# Altium PCB dirver3.PcbDoc
Units mil, origin at the board's own origin, x right, y up, seen from the top; angles counter-clockwise.
Board outline 2165.35 x 2165.35 mil, 2 copper layers (Top Layer, Bottom Layer); 26 components, 28 nets, 106 pads, 33 vias.
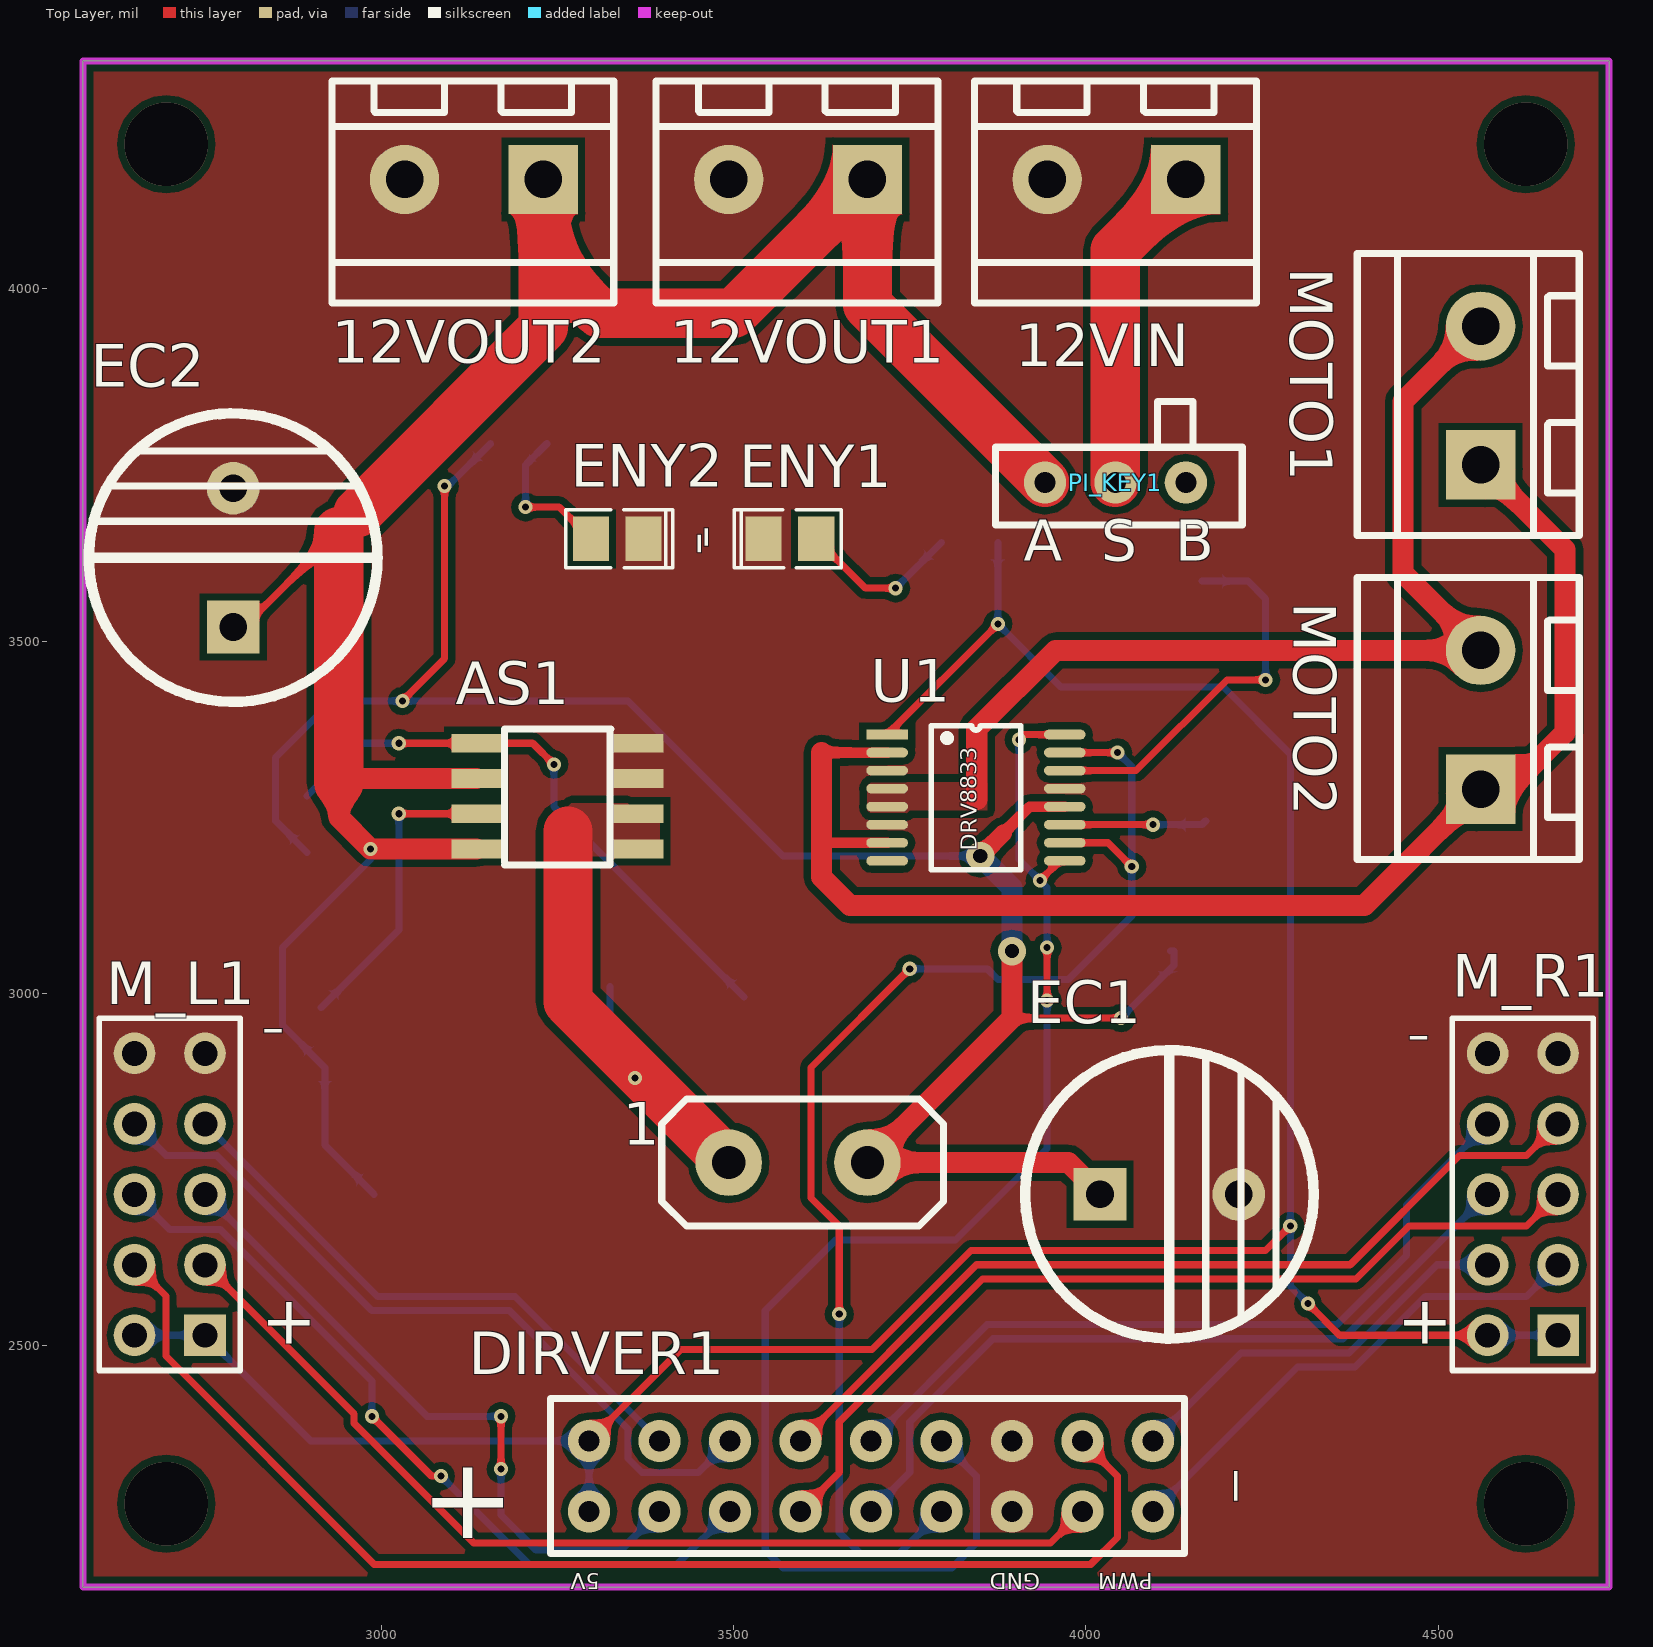
[diagram p0: Top Layer view]
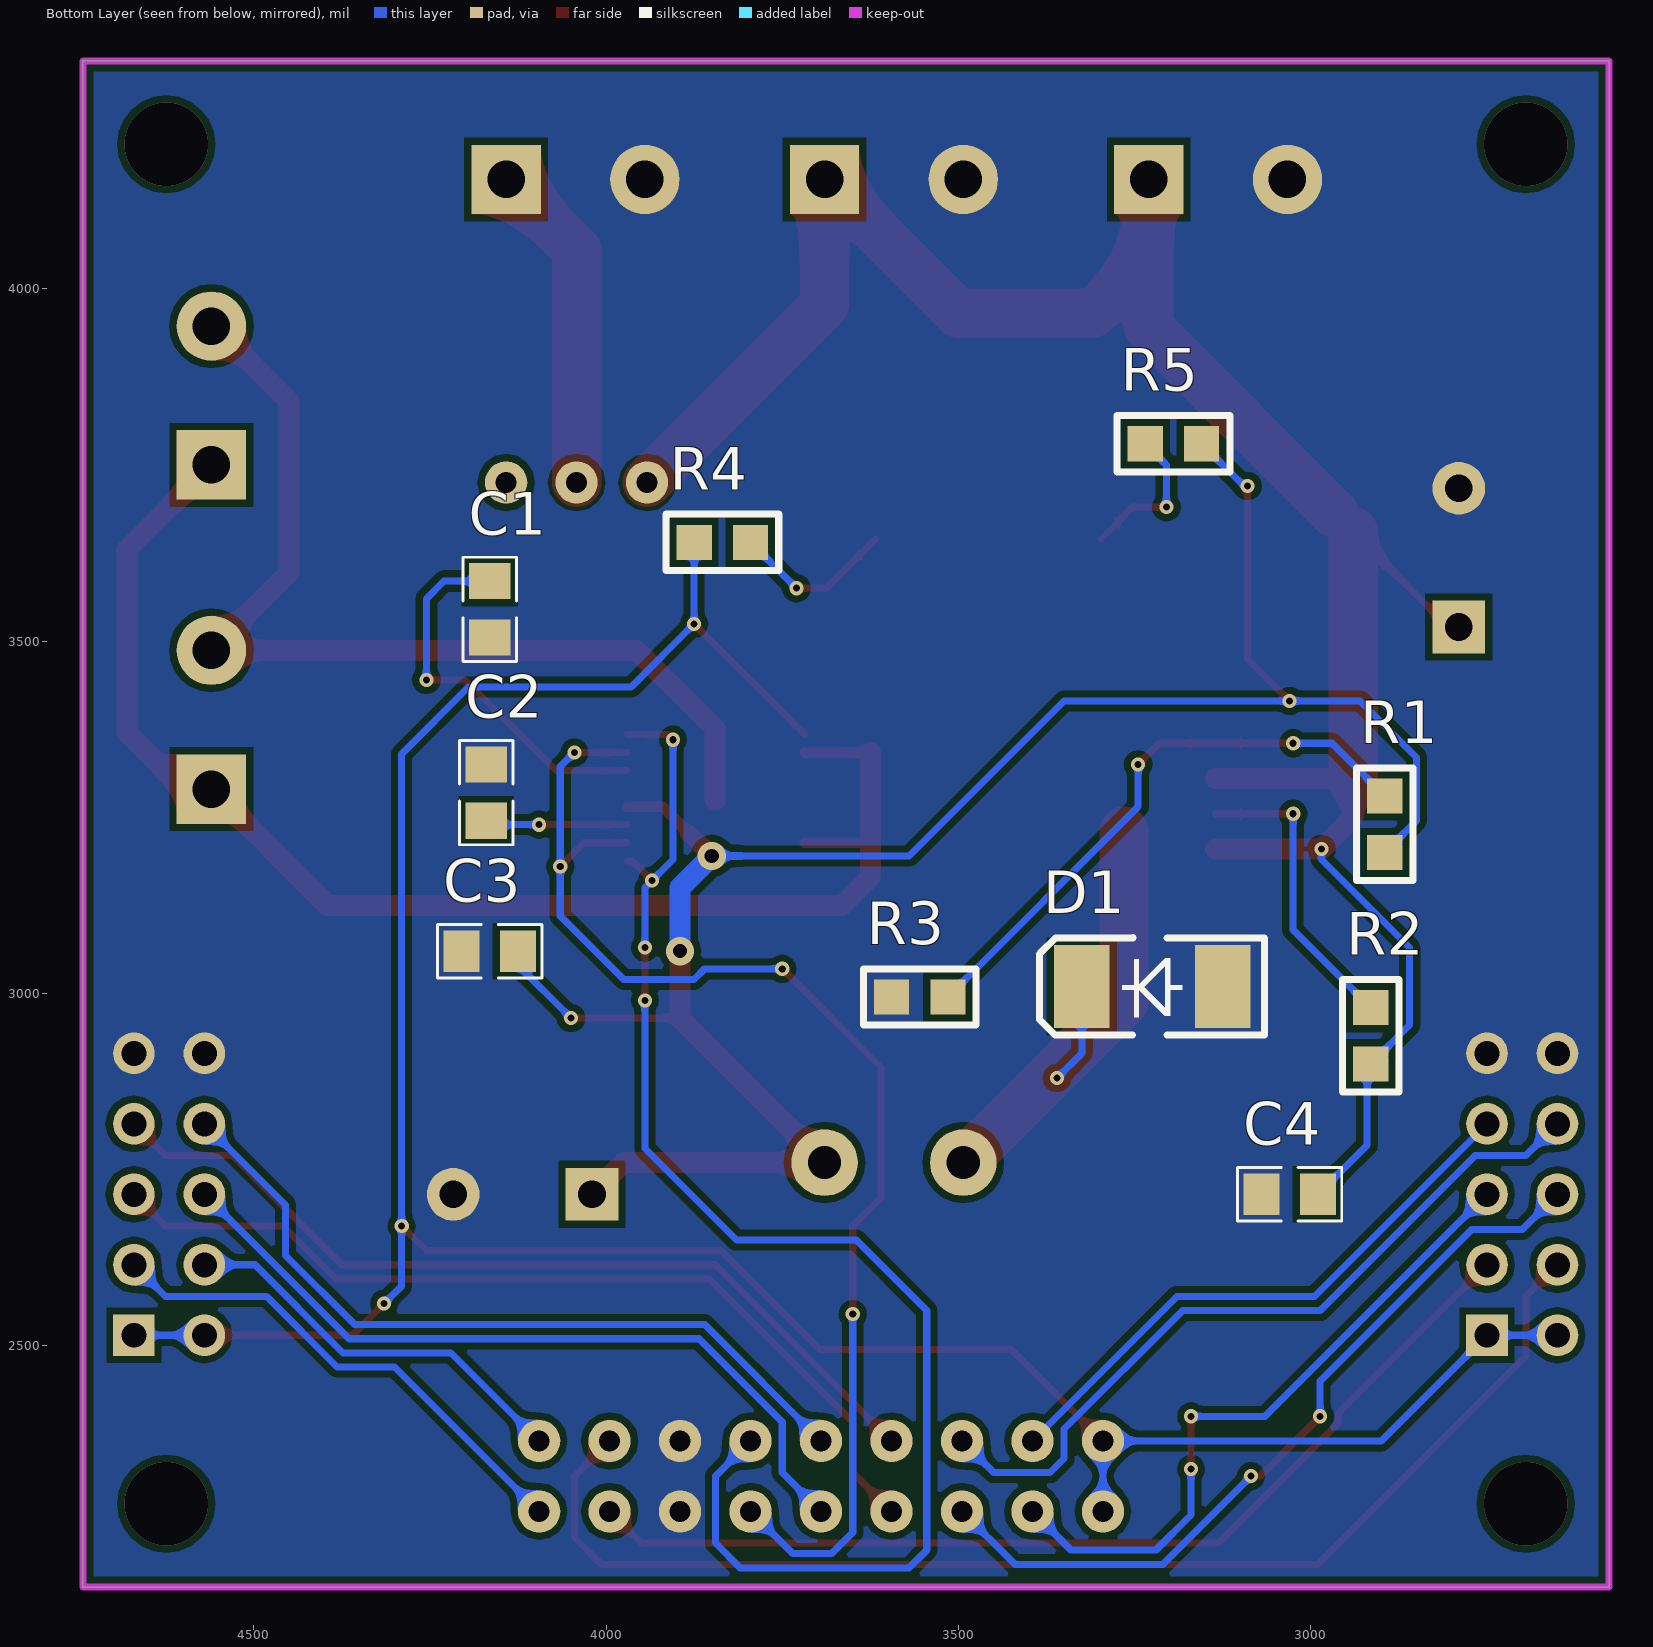
[diagram p1: Bottom Layer view, seen from below]
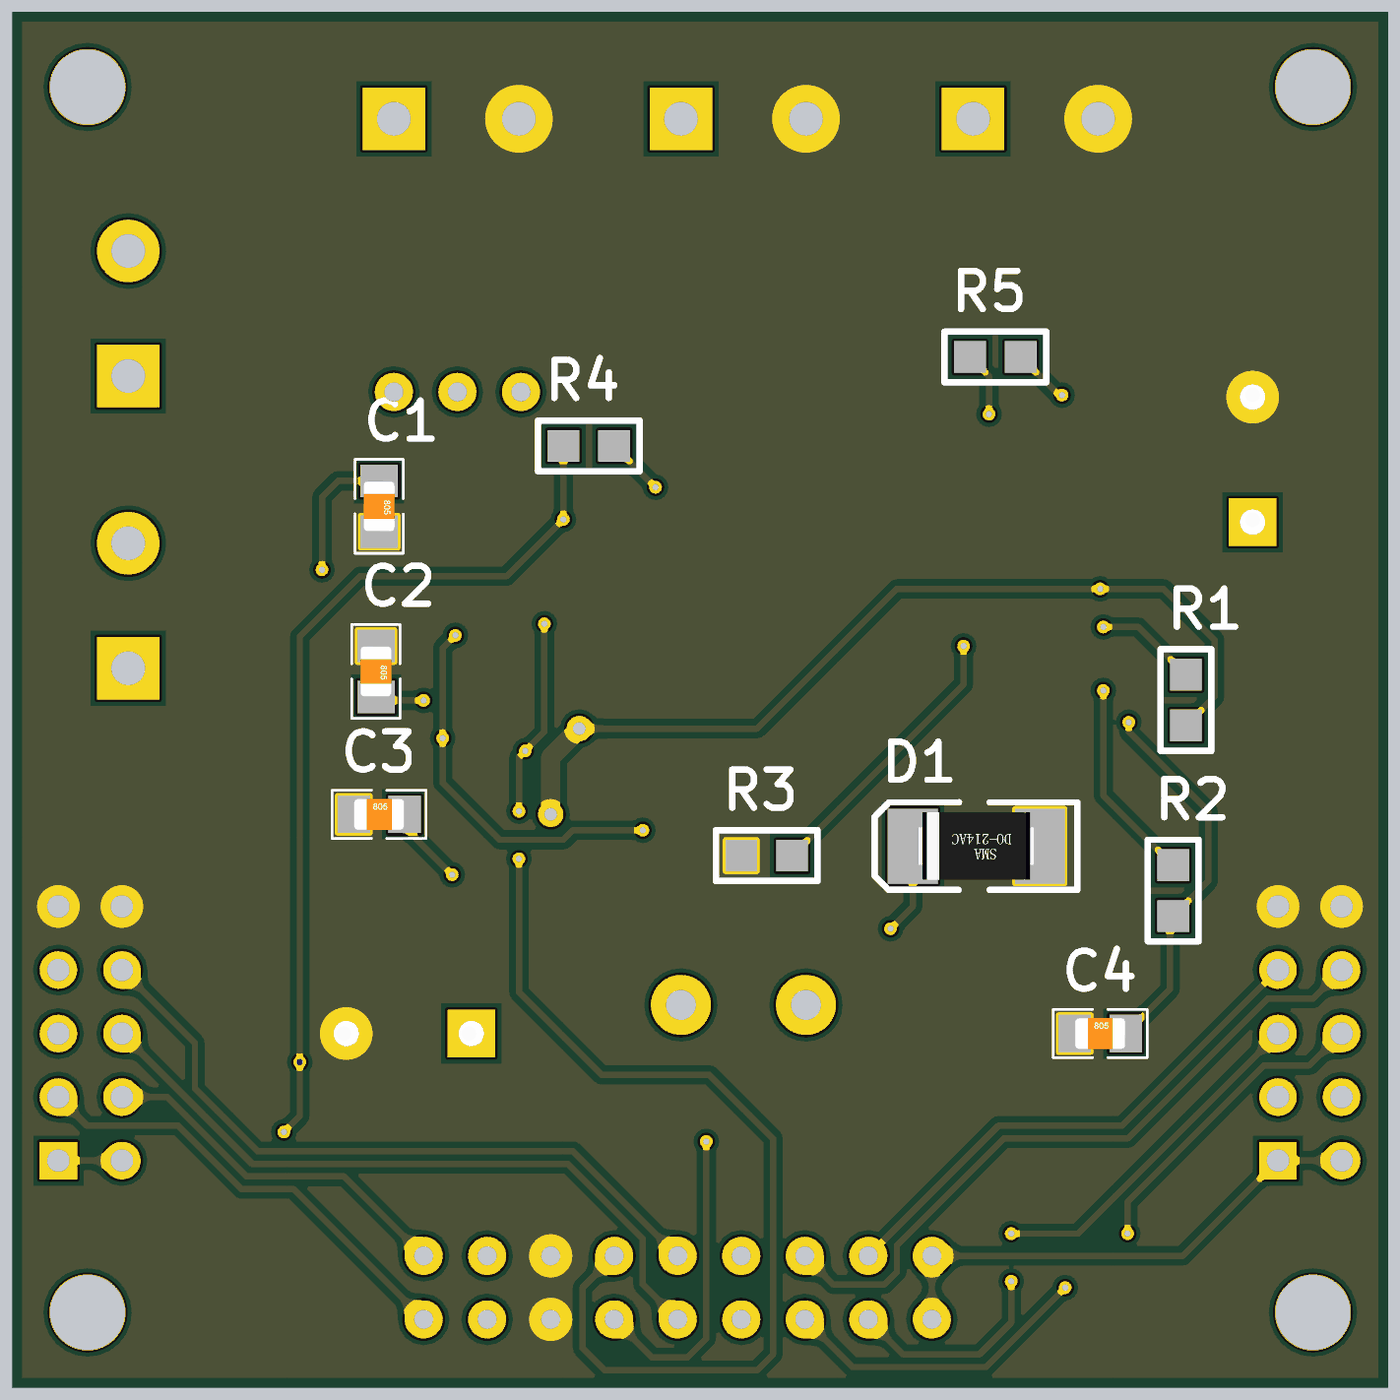
[diagram p2: 3D render of the assembled board from below, using the file's embedded part models]

## Layer stack, top to bottom
Top Solder: solder mask 0.4, Solder Resist, Dk 3.5
Top Layer: signal copper 1.4
Dielectric 1: dielectric 12.6, FR-4, Dk 4.8
Bottom Layer: signal copper 1.4
Bottom Solder: solder mask 0.4, Solder Resist, Dk 3.5

## Board outline
2576.89,2157.76 4742.24,2157.76 4742.24,4323.11 2576.89,4323.11

## Design rules (kind name [scope] priority, off if disabled: settings)
Clearance [All] p1: gap=10 ignorepadtopadclearanceinfootprint=FALSE except(0: Arc-Hole Track-Hole SMDPad-Hole THPad-Hole Via-Hole Fill-Hole Poly-Hole Region-Hole Text-Hole)
PolygonConnect [All] p1: connectstyle=Direct reliefconductorwidth=10 reliefentries=4 polygonreliefangle="90 Angle" airgapwidth=10
RoutingVias [All] p1: holewidth=28 width=50 viastyle="Through Hole" minholewidth=28 minwidth=50 maxholewidth=28 maxwidth=50
SolderMaskExpansion [All] p1: expansion=4
Width [All] p1: maxlimit=500 minlimit=1 preferedwidth=10
30 further rules are at their usual default settings.

## Components (designator, comment, footprint, x,y, rotation, side; value= is the part's Value field where it differs from the comment)
1 "L1" INDUCTOR 3493.15,2780 r0 top
12VIN "HEAD2" HEAD2L-0.8 4141.85,4155 r180 top
12VOUT1 "HEAD2" HEAD2L-0.8 3690,4155 r180 top
12VOUT2 "HEAD2" HEAD2L-0.8 3230,4155 r180 top
AS1 "U1" AS1015 3135,3205 r0 top
C1 "Cap" CAP[0805] 4165,3545 r270 bottom
C2 "Cap" CAP[0805] 4170,3285 r270 bottom
C3 "Cap" CAP[0805] 4165,3060 r180 bottom
C4 "Cap" CAP[0805] 3030,2715 r180 bottom
D1 "IN5824" SMA/DO-214AC 3130,3010 r0 bottom
DIRVER1 "Dirver2" DIRVER2 3295,2265 r90 top
EC1 "330uF" DIP-EC5.0X10X12.5 4020,2715 r0 top
EC2 "330uF" DIP-EC5.0X10X12.5 2790,3520 r90 top
ENY1 "LED0" LED[0805] 3580,3645 r0 top
ENY2 "LED0" LED[0805] 3335,3645 r180 top
M_L1 "Header 5X2" HDR2X5 2750,2515 r90 top
M_R1 "Header 5X2" HDR2X5 4670,2515 r90 top
MOTO1 "HEAD2" HEAD2L-0.8 4560,3750 r90 top
MOTO2 "HEAD2" HEAD2L-0.8 4560,3290 r90 top
PI_KEY1 "PI_KEY" KEY 3941.85,3725 r0 top
R1 "11K" R0805 2895,3280 r270 bottom
R2 "7K5" R0805 2915,2900 r90 bottom
R3 "1K" R0805 3515,2995 r0 bottom
R4 "1K" R0805 3795,3640 r0 bottom
R5 "10K" R0805 3235,3780 r180 bottom
U1 "DRV8833" DRV8833 3718.03,3367.36 r0 top

## Footprints (in the part's own frame and the unit in brackets; to place one, negate y for a bottom-side part, rotate by r counter-clockwise, add the part's x,y. Pads: shape width x height; smd on the part's side, far side on the other; paste and mask are expansions set on the pad)
AS1015 [mm]
  rect 1.8x0.68 smd: 1(0,3.81) 2(0,2.54) 3(0,1.27) 4(0,0) 5(5.842,0) 6(5.842,1.27) 7(5.842,2.54) 8(5.842,3.81)
  round 0.5 on Top Overlay: ""(1.524,3.81)
  silkscreen extent 1.02,-0.58 4.85,4.32
CAP[0805] [mm]
  rect 1.3x1.5 smd: 1(-1.016,0) 2(1.016,0)
  silkscreen extent -1.88,-0.97 1.88,0.97, body extent -1,-0.62 1,0.63, height 0.78
DIP-EC5.0X10X12.5 [mm]
  rect 1.9x1.9 hole 1: 1(0,0)
  round 1.9 hole 1: 2(5,0)
  silkscreen extent -2.7,-5.21 7.7,5.2, body extent -2.41,-5 7.6,5, height 12.55
DIRVER2 [mil]
  round 60 hole 30: 1(0,0) 2(100,0) 3(0,-100) 4(100,-100) 5(0,-200) 6(100,-200) 7(0,-300) 8(100,-300) 9(0,-400) 10(100,-400) 11(0,-500) 12(100,-500) 13(0,-600) 14(100,-600) 15(0,-700) 16(100,-700) 17(0,-800) 18(100,-800)
  silkscreen extent -60,-845 160,55
DRV8833 [mm]
  rect 1.5x0.35 smd: 1(0,0)
  oval 1.5x0.35 smd: 2(0,-0.65) 3(0,-1.3) 4(0,-1.95) 5(0,-2.6) 6(0,-3.25) 7(0,-3.9) 8(0,-4.55) 9(6.4,-4.55) 10(6.4,-3.9) 11(6.4,-3.25) 12(6.4,-2.6) 13(6.4,-1.95) 14(6.4,-1.3) 15(6.4,-0.65) 16(6.4,0)
  silkscreen extent 1.58,-4.88 4.82,0.33
HDR2X5 [mm] "Connector; Header; 5x2 Position"
  rect 1.5x1.5 hole 0.9: 1(0,0)
  round 1.5 hole 0.9: 2(0,2.54) 3(2.54,0) 4(2.54,2.54) 5(5.08,0) 6(5.08,2.54) 7(7.62,0) 8(7.62,2.54) 9(10.16,0) 10(10.16,2.54)
  silkscreen extent -1.27,-1.27 11.43,3.81
HEAD2L-0.8 [mm]
  rect 2.5x2.5 hole 1.35: 1(0,0)
  round 2.5 hole 1.35: 2(5,0)
  silkscreen extent -2.54,-3.56 7.62,4.44
INDUCTOR [mm]
  round 2.4 hole 1.2: 1(0,-0.508) 2(5,-0.508)
  silkscreen extent -2.41,-2.79 7.75,1.78
KEY [mil]
  round 60 hole 30: 1(0,0) 2(100,0) 3(200,0)
  silkscreen extent -70,-60 280,115
LED[0805] [mm]
  rect 1.3x1.6 smd: 1(0.95,0) 2(-0.95,0)
  silkscreen extent -2.01,-1.04 1.85,1.04, body extent -1.02,-0.63 1.02,0.64, height 1.1
R0805 [mil]
  rect 50x50 smd: 1(0,0) 2(80,0)
  silkscreen extent -40,-40 120,40
SMA/DO-214AC [mm]
  rect 2x3 smd: A(-0.127,0) K(4.953,0)
  silkscreen extent -1.63,-1.75 6.48,1.75, body extent 0.11,-1.35 4.71,1.35, height 2.4

## Part data
1: library part INDUCTOR
AS1: library part LED2
D1: library part "DIODE SCHOTTKY", "肖特基二极管"
EC1 EC2: library part DIP_ECAP, "直插电解电容"
M_L1 M_R1: "Header, 5-Pin, Dual row", LatestRevisionDate=17-Jul-2002, LatestRevisionNote="Re-released for DXP Platform.", Publisher="Altium Limited"
PI_KEY1: library part key
R1 R2 R3 R4 R5: library part RES
C1: =2.2uF
C2: =10nF
C3 C4: =104

## Via types
v1: diameter 20, hole 10, Top Layer to Bottom Layer, 27 vias
v2: diameter 118.11, hole 118.11, Top Layer to Bottom Layer, 4 vias
v3: diameter 40, hole 20, Top Layer to Bottom Layer, 2 vias

## Nets (pads, with @x,y where several pads share a name; then routed paths per layer and width w, separated by ;. In a path a pad name is that pad's centre, name@x,y a point inside that pad or via, vN(x,y) a via of type N, cw(c..) or ccw(c..) an arc to the next point about the centre after c; other vN are vias at no path point)
3V3: DIRVER1.1 DIRVER1.2 M_L1.1 M_L1.2 M_R1.1 M_R1.2 R4.2 U1.1 | length 3921.5
  Top Layer w10: DIRVER1.2 3425,2495 3696.72,2495 3836.72,2635 4255,2635 v1(4290,2670) ; U1.1 v1(3875,3524.33) ; v1(4315,2560) 4360,2515 M_R1.2
  Bottom Layer w10: M_L1.2 M_L1.1 2900,2365 DIRVER1.2 DIRVER1.1 ; R4.2 v1(3875,3524.33) 3964.33,3435 4195,3435 4290,3340 v1(4290,2670) 4290,2585 v1(4315,2560) ; M_R1.2 M_R1.1
9.5V: 1.2 C3.2 EC1.1 R1.2 R5.2 U1.12 | length 3019.9
  Top Layer w10: v1(3030,3415) 3090,3475 v1(3090,3720) ; 3895,2965 v1(4050,2965)
  Top Layer w15: 3882.5,3227.5 3920,3265 U1.12
  Top Layer w25: v3(3850,3195) 3882.5,3227.5
  Top Layer w30: v3(3895,3060) 3895,2965 1.2 3975,2760 EC1.1
  Bottom Layer w10: R1.2 2850,3245 2850,3335 2930,3415 v1(3030,3415) 3350,3415 3570,3195 v3(3850,3195) ; v1(3090,3720) 3095,3720 R5.2 ; v1(4050,2965) 4125,3040 C3.2 C3.2@4120,3060
  Bottom Layer w30: v3(3850,3195) 3895,3150 v3(3895,3060)
12V: 12VOUT1.1 12VOUT2.1 AS1.2 AS1.4 C4.2 EC2.1 PI_KEY1.1 R2.1 | length 3344
  Top Layer w10: EC2.1 2805,3520 2940,3655 2967.5,3682.5
  Top Layer w30: AS1.4 v1(2985,3205) 2940,3250 2940,3298.96 2946.04,3305 AS1.2
  Top Layer w70: 2940,3298.96 2940,3655 ; 2967.5,3682.5 3230,3945 3230,4045 ; 12VOUT2.1 3230,4045 ; PI_KEY1.1 3690,3976.85 12VOUT1.1 3500,3965 3310,3965 3230,4045
  Bottom Layer w10: v1(2985,3205) 2985,3190 2860,3065 2860,2955 R2.1 2920,2895 2920,2785 C4.2
C6: DIRVER1.15 M_L1.3 | length 1435.2
  Top Layer w10: M_L1.3 2961.72,2403.28 2961.72,2389.64 3131.36,2220 3950,2220 DIRVER1.15
C7: DIRVER1.16 M_L1.4 | length 1794.2
  Top Layer w10: M_L1.4 2694.53,2570.47 2694.53,2485.47 2990,2190 4006.85,2190 4045,2228.15 4045,2315 DIRVER1.16
C8: DIRVER1.17 M_R1.3 | length 720
  Bottom Layer w10: DIRVER1.17 4300,2470 4381.57,2470 4481.57,2570 4625,2570 M_R1.3
C9: DIRVER1.18 M_R1.4 | length 578.6
  Bottom Layer w10: DIRVER1.18 4220,2490 4373.28,2490 4498.28,2615 M_R1.4
F0: DIRVER1.3 M_L1.5 | length 959
  Top Layer w10: v1(3170,2325) v1(3170,2400)
  Bottom Layer w10: M_L1.5 3065,2400 v1(3170,2400) ; v1(3170,2325) 3170,2260 3220,2210 3340,2210 DIRVER1.3
F1: DIRVER1.4 M_L1.7 | length 831.4
  Bottom Layer w10: M_L1.7 2995,2570 3190,2570 DIRVER1.4
F2: DIRVER1.5 M_L1.6 | length 1122.8
  Top Layer w10: v1(2986.72,2400) 3071.72,2315 v1(3085,2315)
  Bottom Layer w10: M_L1.6 2700,2665 2771.72,2665 2986.72,2450 v1(2986.72,2400) ; v1(3085,2315) 3210,2190 3420,2190 DIRVER1.5
F3: DIRVER1.6 M_L1.8 | length 1093.1
  Bottom Layer w10: M_L1.8 2695,2770 2766.72,2770 2986.72,2550 3181.72,2550 3350,2381.72 3350,2340 3370,2320 3450,2320 DIRVER1.6
F4: DIRVER1.7 M_R1.5 | length 1303.4
  Top Layer w10: DIRVER1.7 3650,2320 3650,2391.72 3853.28,2595 4383.28,2595 4458.28,2670 4625,2670 M_R1.5
F5: DIRVER1.8 M_R1.7 | length 1261.4
  Top Layer w10: DIRVER1.8 3845,2615 4375,2615 4530,2770 4625,2770 M_R1.7
F6: DIRVER1.9 M_R1.6 | length 1103.4
  Bottom Layer w10: DIRVER1.9 3750,2320 3750,2391.72 3868.28,2510 4365,2510 M_R1.6
F7: DIRVER1.10 M_R1.8 | length 1103.4
  Bottom Layer w10: DIRVER1.10 3860,2530 4356.72,2530 4455,2628.28 4455,2700 M_R1.8
F8: DIRVER1.11 U1.10 U1.15 | length 1839.4
  Top Layer w10: v1(3650,2545) 3650,2670 3610,2710 3610,2895 v1(3750,3035) ; U1.10 4031.18,3213.82 v1(4065,3180) ; U1.15 v1(4045,3341.77)
  Bottom Layer w10: v1(3650,2545) 3650,2235 3680,2205 3735,2205 DIRVER1.11 ; v1(3750,3035) 3860,3035 3875,3020 3975,3020 4065,3110 v1(4065,3180) 4065,3321.77 v1(4045,3341.77)
F9: DIRVER1.12 U1.9 U1.16 | length 2037.1
  Top Layer w10: v1(3905,3360) 3912.36,3367.36 U1.16 ; v1(3935,3160) 3963.23,3188.23 U1.9 ; v1(3945,2990) v1(3945,3065)
  Bottom Layer w10: DIRVER1.12 3845,2315 3845,2220 3810,2185 3570,2185 3545,2210 3545,2550 3645,2650 3815,2650 3945,2780 v1(3945,2990) ; v1(3905,3360) 3905,3190 v1(3935,3160) 3945,3150 v1(3945,3065)
GND: 12VIN.2 12VOUT1.2 12VOUT2.2 AS1.7 AS1.8 C1.2 C2.1 C3.1 C4.1 D1.A DIRVER1.13 DIRVER1.14 EC1.2 EC2.2 ENY1.2 ENY2.2 M_L1.9 M_L1.10 M_R1.9 M_R1.10 R3.2 U1.3 U1.6 U1.13
Net1_1: 1.1 AS1.5 AS1.6 D1.K | length 709
  Top Layer w70: 3265,3230 3265,2988.15 1.1
  Bottom Layer w10: D1.K 3325,2915 v1(3360,2880)
Net12VIN_1: 12VIN.1 PI_KEY1.2 | length 471.4
  Top Layer w70: PI_KEY1.2 4041.85,4055 12VIN.1
NetAS1_1: AS1.1 R1.1 R3.1 | length 835.3
  Top Layer w10: v1(3025,3355) AS1.1 3215,3355 v1(3245,3325)
  Bottom Layer w10: R1.1 2970,3355 v1(3025,3355) ; v1(3245,3325) 3245,3265 R3.1
NetAS1_3: AS1.3 R2.2 | length 430.6
  Top Layer w10: v1(3025,3255) AS1.3
  Bottom Layer w10: R2.2 3025,3090 v1(3025,3255)
NetC1_1: C1.1 U1.14 | length 553.7
  Top Layer w10: U1.14 4071.18,3316.18 4200,3445 v1(4255,3445)
  Bottom Layer w10: C1.1 4230,3585 4255,3560 v1(4255,3445)
NetC2_2: C2.2 U1.11 | length 202.3
  Top Layer w10: U1.11 v1(4095,3239.41)
  Bottom Layer w10: v1(4095,3239.41) 4164.41,3239.41 C2.2
NetENY1_1: ENY1.1 R4.1 | length 233.5
  Top Layer w10: ENY1.1 3687.4,3575 v1(3730,3575)
  Bottom Layer w10: v1(3730,3575) R4.1
NetENY2_1: ENY2.1 R5.1 | length 213.7
  Top Layer w10: v1(3205,3690) 3252.6,3690 ENY2.1
  Bottom Layer w10: v1(3205,3690) 3205,3750 R5.1
NetMOTO1_1: MOTO1.1 MOTO2.1 U1.2 U1.7 | length 1966.1
  Top Layer w15: 3625,3215 3626.18,3213.82 U1.7 ; 3625,3341.77 U1.2
  Top Layer w30: 3625,3341.77 3625,3215 3625,3165 3665,3125 4395,3125 MOTO2.1 4600,3290 4680,3370 4680,3630 MOTO1.1
NetMOTO1_2: MOTO1.2 MOTO2.2 U1.4 U1.5 | length 1414.3
  Top Layer w30: 3845,3275 3845,3375 3956.85,3486.85 MOTO2.2 4450,3596.85 4450,3840 4556.85,3946.85 MOTO1.2
pads on no net: AS1. PI_KEY1.3 U1.8
copper on no net:
  other v2: 2695,2275.87 4624.13,2275.87 2695,4205 4624.13,4205

## Polygon pours and split planes (outlines as drawn)
GND on Top Layer (solid, pour order 10): 2576.89,4323.11 4742.24,4323.11 4742.24,2157.76 2576.89,2157.76
GND on Top Layer (solid, pour order 6): 2576.89,4323.11
Net1_1 on Top Layer (solid, pour order 2): 3400,3265 3395,3260 3395,3195 3335,3195 3330,3190 3325,3195 3265,3195 3265,3255 3260,3260 3270,3270 3350,3270 3365,3255 3385,3255
NetMOTO1_2 on Top Layer (solid, pour order 0): 3690,3300 3690,3255 3745,3255 3750,3260 3860,3260 3860,3305 3855,3300
GND on Bottom Layer (solid, pour order 8): 2576.89,4323.11 2576.89,2157.76 4742.24,2157.76 4742.24,4323.11

## Keep-outs
Keep-Out Layer:
  the board outline again, w10

## Silkscreen, mask and mechanical layers (free items; w line width, h text height)
Top Overlay:
  text "-" at 3405,3655 h118.11 r270
  text "-" at 3508,3630 h118.11 r90
  text "-" at 2830,2900 h118.11
  text "-" at 4455,2890 h118.11
  text "+" at 2830,2480 h118.11
  text "+" at 4441.89,2480 h118.11

## Text inside footprints (layer, text, board x,y; h text height)
DIRVER1: Top Overlay "5V" at 3310,2185 h39.37 r180; Top Overlay "GND" at 3935,2185 h39.37 r180; Top Overlay "+" at 3190,2365 h200 r180; Top Overlay "-" at 4135,2330 h200 r270; Top Overlay "PWM" at 4095,2185 h39.37 r180
PI_KEY1: Top Overlay "B" at 4126.85,3595 h100; Top Overlay "S" at 4021.85,3595 h100; Top Overlay "A" at 3911.85,3595 h100